# Altium PCB Arduino UNO R3 shield - small.pcbdoc
Units mil, origin at the board's own origin, x right, y up, seen from the top; angles counter-clockwise.
Board outline 2248.82 x 2101.51 mil, 2 copper layers (Top Layer, Bottom Layer); 3 components, 12 nets, 14 pads, 32 vias.
Unrouted connection lines stored in the file: 16.
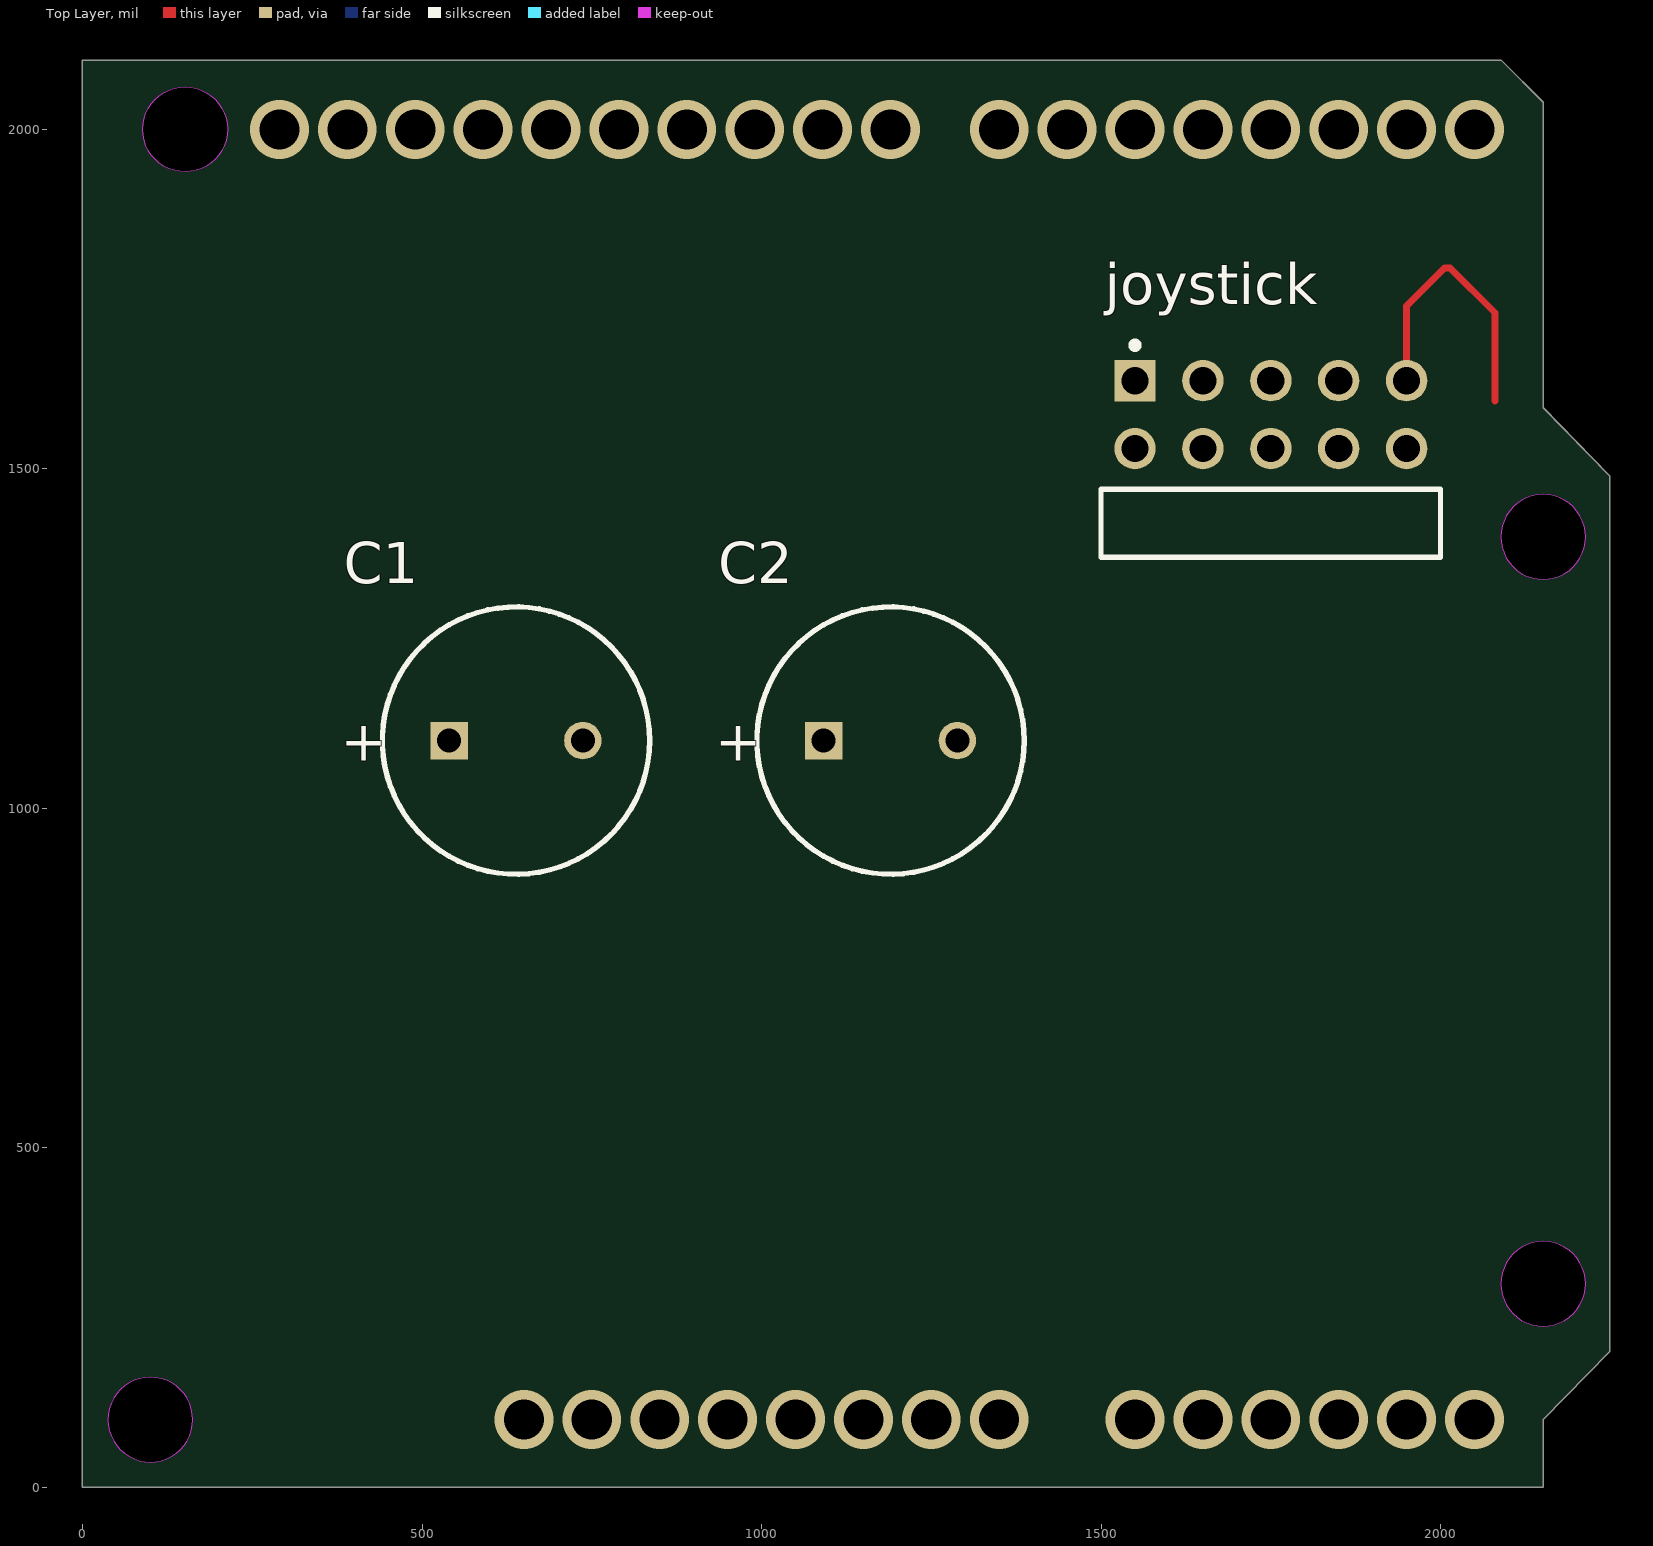
[diagram p0: Top Layer view]
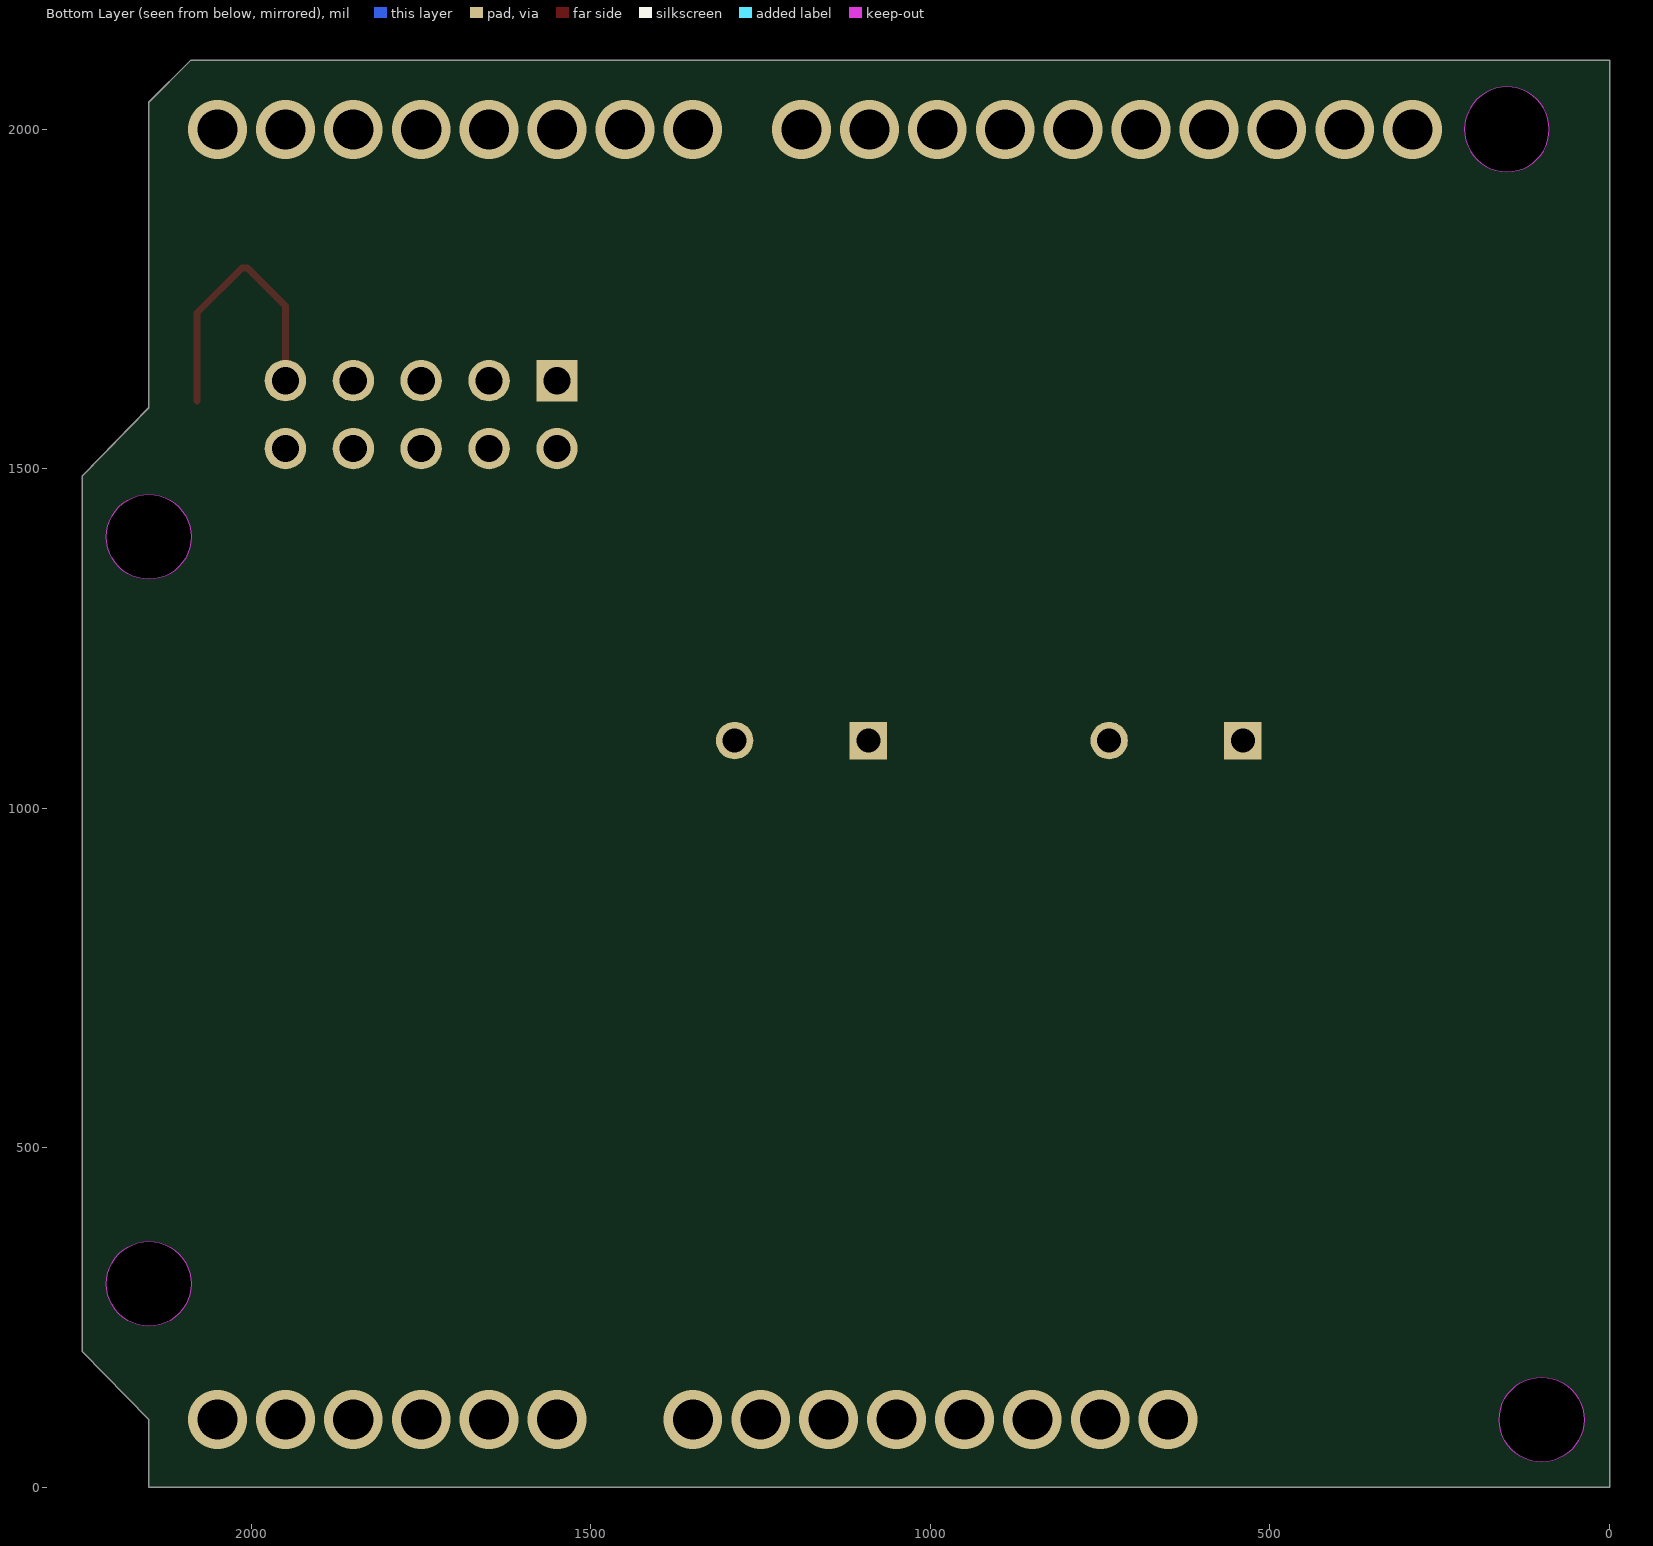
[diagram p1: Bottom Layer view, seen from below]

## Layer stack, top to bottom
Top Solder: solder mask 0.4, Solder Resist, Dk 3.5
Top Layer: signal copper 1.4
Dielectric1: dielectric 12.6, FR-4, Dk 4.8
Bottom Layer: signal copper 1.4
Bottom Solder: solder mask 0.4, Solder Resist, Dk 3.5

## Board outline
0,0 0,2101.51 2089.58,2101.51 2151.18,2039.91 2151.18,1590 2248.82,1490 2248.82,200 2151.18,100 2151.18,0
cut-out: 37.5,100 ccw(c100,100) 100,37.5 ccw(c100,100) 162.5,100 ccw(c100,100) 100,162.5 ccw(c100,100)
cut-out: 2088.68,300 ccw(c2151.18,300) 2151.18,237.5 ccw(c2151.18,300) 2213.68,300 ccw(c2151.18,300) 2151.18,362.5 ccw(c2151.18,300)
cut-out: 2088.68,1400 ccw(c2151.18,1400) 2151.18,1337.5 ccw(c2151.18,1400) 2213.68,1400 ccw(c2151.18,1400) 2151.18,1462.5 ccw(c2151.18,1400)
cut-out: 151.18,1937.5 cw(c151.18,2000) 88.68,2000 cw(c151.18,2000) 151.18,2062.5 cw(c151.18,2000) 213.68,2000 cw(c151.18,2000)

## Design rules (kind name [scope] priority, off if disabled: settings)
Clearance [All] p1: gap=10 ignorepadtopadclearanceinfootprint=TRUE except(31.89: Arc-Arc Arc-Track Arc-SMDPad Arc-THPad Arc-Via Arc-Fill Arc-Poly Arc-Region Arc-Text Arc-Hole Track-Track Track-SMDPad Track-THPad Track-Via Track-Fill Track-Poly Track-Region Track-Text Track-Hole)
FabricationTestPointUsage TestPointUsage [All] p1: valid=0 allowmultiple=FALSE
FabricationTestpoint Testpoint [All] p1: side=3 testpointundercomponent=TRUE minsize=40 maxsize=100 preferedsize=60 minholesize=0 maxholesize=40 preferedholesize=32 testpointgrid=1 allowsidetop=TRUE allowsidebottom=TRUE usegrid=TRUE gridtolerance=0.01
HoleSize [All] p1: absolutevalues=TRUE maxlimit=100 minlimit=15.75 maxpercent=80.000 minpercent=20.000
HoleToHoleClearance [All] p1: gap=15.75 allowstackedmicrovias=TRUE
PolygonConnect [All] p1: connectstyle=Relief reliefconductorwidth=10 reliefentries=4 polygonreliefangle="90 Angle" airgapwidth=10
RoutingVias [All] p1: holewidth=28 width=50 viastyle="Through Hole" minholewidth=28 minwidth=50 maxholewidth=28 maxwidth=50
SilkToSolderMaskClearance SilkscreenOverComponentPads [IsPad] p1: minsilkscreentomaskgap=10 clearancetoexposedcopper=TRUE
SolderMaskExpansion [All] p1: expansion=4 istentingtop=FALSE
SupplyNets "Schematic Supply Nets" [InNet('GND')] p1: voltage=0.000
Width [All] p1: maxlimit=10 minlimit=10 preferedwidth=10
25 further rules are at their usual default settings.

## Components (designator, comment, footprint, x,y, rotation, side; value= is the part's Value field where it differs from the comment)
C1 "ECA-1HM471" CAPPR65-500-2000X1000X2200 638.43,1100 r0 top value=470µF
C2 "ECA-1HM471" CAPPR65-500-2000X1000X2200 1190,1100 r0 top value=470µF
joystick "68021-210HLF" FCI-68021-210HLF-10_V 1750,1580 r0 top

## Footprints (in the part's own frame and the unit in brackets; to place one, negate y for a bottom-side part, rotate by r counter-clockwise, add the part's x,y. Pads: shape width x height; smd on the part's side, far side on the other; paste and mask are expansions set on the pad)
CAPPR65-500-2000X1000X2200 [mm] "THD, 2-Leads, Dia 10mm, Pin Spacing 5mm"
  rect 1.4x1.4 hole 0.9: 1(-2.5,0)
  round 1.4 hole 0.9: 2(2.5,0)
  silkscreen extent -5,-5 5,5, body extent -5,-5 4.95,5, height 22
FCI-68021-210HLF-10_V [mm] "THD, 10-Leads, Body 12.7x2.54mm, Pitch 2.54mm"
  round 1.55 hole 1.02: A2(-2.54,-1.27) A3(0,-1.27) A4(2.54,-1.27) A5(5.08,-1.27) B2(-2.54,1.27) B3(0,1.27) B4(2.54,1.27) B5(5.08,1.27) V(-5.08,-1.27)
  rect 1.55x1.55 hole 1.02: GND(-5.08,1.27)
  silkscreen extent -6.35,-5.33 6.35,2.72, body extent -6.32,-11.13 6.32,1.64, height 4.83

## Part data
C1 C2: library part CMP-001-00032-8, "Aluminum Electrolytic Capacitor, 470 uF, +/- 20%, 50 V, -40 to 85 degC, 2-Pin THD, RoHS, Bulk", Capacitor Type=Electrolytic, Case/Package=Radial, Manufacturer=Panasonic, Max Operating Temperature=85°C, Min Operating Temperature=-40°C, Package Description="2-Pin Radial Lead, Dia 10 mm, Height 22 mm", Package Quantity=200, Package Reference=CAPPR65-500-2000X1000X2200, Ripple Current=650mA, Tolerance=20%, Voltage Rating=50V, Datasheet URL=http://industrial.panasonic.com/cdbs/www-data/pdf/RDF0000/ABA0000C1047.pdf, Datasheet Version=Mar-16, Diameter=10mm, Lead Pitch=5mm, Manufacturer URL=http://www.panasonic.com/, Mounting Technology=TH, Packaging=Bulk, Pins=2, Ripple Current (AC)=650mA, RoHS Compliant=True
joystick: library part CMP-002-00020-2, "Male Header, Pitch 2.54 mm, 2 x 5 Position, Height 4.83 mm, Tail Length 3.05 mm, Bulk", Case/Package=68021-210HLF-10, Manufacturer="FCI Electronics", Package Description="Male Header, Pitch 2.54 mm, 2 x 5 Position, Height 4.83 mm, Tail Length 3.05 mm", Connector Type=Header, Datasheet URL=http://portal.fciconnect.com/Comergent//fci/drawing/68020.pdf, Datasheet Version="Rev. BM, 04/2015", Gender=Male, Manufacturer URL=http://portal.fciconnect.com/, Mounting Technology=TH, Package Reference=68021-210HLF-10, RoHS Compliant=Unknown

## Via types
v1: diameter 86.61, hole 59.06, Top Layer to Bottom Layer, 32 vias

## Nets (pads, with @x,y where several pads share a name; then routed paths per layer and width w, separated by ;. In a path a pad name is that pad's centre, name@x,y a point inside that pad or via, vN(x,y) a via of type N, cw(c..) or ccw(c..) an arc to the next point about the centre after c; other vN are vias at no path point)
GND: C1.2 C2.2 joystick.GND
  other v1: 1150,100 1250,100 590,2000
Net*_4: joystick.V
  other v1: 1050,100
Net*_20: joystick.B5 | length 420.4
  Top Layer w10: joystick.B5 1950,1740 2005.86,1795.86 2014.14,1795.86 2080,1730 2080,1600
  other v1: 1850,2000
Net*_21: joystick.B4
  other v1: 1750,2000
Net*_25: joystick.A5
  other v1: 1350,2000
Net*_26: joystick.A4
  other v1: 1190,2000
Net*_27: joystick.B2
  other v1: 1090,2000
Net*_28: joystick.A2
  other v1: 990,2000
Net*_29: joystick.A3
  other v1: 890,2000
Net*_30: joystick.B3
  other v1: 790,2000
NetC1_1: C1.1
  other v1: 1450,2000
NetC2_1: C2.1
  other v1: 1550,2000
copper on no net:
  other v1: 650,100 750,100 850,100 950,100 1350,100 1550,100 1650,100 1750,100 1850,100 1950,100 2050,100 290,2000 390,2000 490,2000 690,2000 1650,2000 1950,2000 2050,2000

## Silkscreen, mask and mechanical layers (free items; w line width, h text height)
Mechanical 1:
  circle w0.5: c291.18,2000 r10
  circle w0.5: c391.18,2000 r10
  circle w0.5: c491.18,2000 r10
  circle w0.5: c591.18,2000 r10
  circle w0.5: c691.18,2000 r10
  circle w0.5: c791.18,2000 r10
  circle w0.5: c891.18,2000 r10
  circle w0.5: c991.18,2000 r10
  circle w0.5: c1091.18,2000 r10
  circle w0.5: c1191.18,2000 r10
  circle w0.5: c1350,2000 r10
  circle w0.5: c1450,2000 r10
  circle w0.5: c1550,2000 r10
  circle w0.5: c1650,2000 r10
  circle w0.5: c1750,2000 r10
  circle w0.5: c1850,2000 r10
  circle w0.5: c1950,2000 r10
  circle w0.5: c2050,2000 r10
  circle w0.5: c650,100 r10
  circle w0.5: c750,100 r10
  circle w0.5: c850,100 r10
  circle w0.5: c950,100 r10
  circle w0.5: c1050,100 r10
  circle w0.5: c1150,100 r10
  circle w0.5: c1250,100 r10
  circle w0.5: c1350,100 r10
  circle w0.5: c1550,100 r10
  circle w0.5: c1650,100 r10
  circle w0.5: c1750,100 r10
  circle w0.5: c1850,100 r10
  circle w0.5: c1950,100 r10
  circle w0.5: c2050,100 r10
  circle w0.5: c100,100 r62.5
  circle w0.5: c2151.18,300 r62.5
  circle w0.5: c2151.18,1400 r62.5
  circle w0.5: c151.18,2000 r62.5
  lines w0.5: 0,0 0,2101.51 2089.58,2101.51 2151.18,2039.91 2151.18,1590 2248.82,1490 2248.82,200 2151.18,100 2151.18,0 0,0
Mechanical 16:
  lines w5: -3720,-1350 -3520,-1350 ; -3720,550 -3520,550 ; -3720,2450 -3520,2450 ; -845,-3250 -845,-3050 ; -845,4150 -845,4350 ; 1680,-3050 3080,-3050 ; 2030,-3250 2030,-3050 ; 2030,4150 2030,4350 ; 3080,-2750 7580,-2750 ; 3080,-2450 7580,-2450 ; 3080,-2150 4580,-2150 ; 4580,-3050 4580,-2450 4580,-1850 ; 4905,-3250 4905,-3050 ; 4905,4150 4905,4350 ; 6680,-3050 6680,-2450 ; 7580,-1350 7780,-1350 ; 7580,550 7780,550 ; 7580,2450 7780,2450 ; 3080,-3050 3080,-1850 4580,-1850 ; 3080,-3050 7580,-3050 ; 4580,-1850 7580,-1850 7580,-3050 ; 7580,-3050 7580,4150 -3520,4150 -3520,-3050 7580,-3050 ; -3720,-3250 -3720,4350 7780,4350 7780,-3250 -3720,-3250
  text "1" at -2293,4215 h70
  text "2" at 567,4215 h70
  text "3" at 3447,4215 h70
  text "4" at 6317,4215 h70
  text "A" at -3645,3309 h70
  text "A" at 7655,3309 h70
  text "B" at -3645,1417 h70
  text "B" at 7655,1417 h70
  text "C" at -3645,-493 h70
  text "C" at 7655,-493 h70
  text "ENGINEER:" at 3130,-1950 h45
  text "TITLE:" at 4630,-1950 h45
  text "PCB DESIGNER:" at 3130,-2245 h45
  text "D" at -3645,-2383 h70
  text "D" at 7655,-2383 h70
  text "DATE:" at 3130,-2550 h45
  text "PART NO.:" at 4630,-2550 h45
  text "REV:" at 6730,-2550 h45
  text ".PRINT_DATE" at 3180,-2670 h70
  text "FILE NAME:" at 3130,-2850 h45
  text "DWG NO:" at 4630,-2850 h45
  text "SCALE:" at 6730,-2850 h45
  text ".PCB_FILE_NAME_NO_PATH" at 3180,-2970 h70
  text "1" at -2293,-3185 h70
  text "2" at 567,-3185 h70
  text "3" at 3447,-3185 h70
  text "4" at 6317,-3185 h70

## Text inside footprints (layer, text, board x,y; h text height)
C1: Top Overlay "+" at 380.56,1070.47 h59.06
C2: Top Overlay "+" at 932.14,1070.47 h59.06